# Altium PCB touch-2ch-2.PcbDoc
Units mm, origin at the board's own origin, x right, y up, seen from the top; angles counter-clockwise.
Board outline 90.83 x 39.88 mm, 2 copper layers (Top Layer, Bottom Layer); 32 components, 34 nets, 81 pads, 0 vias.
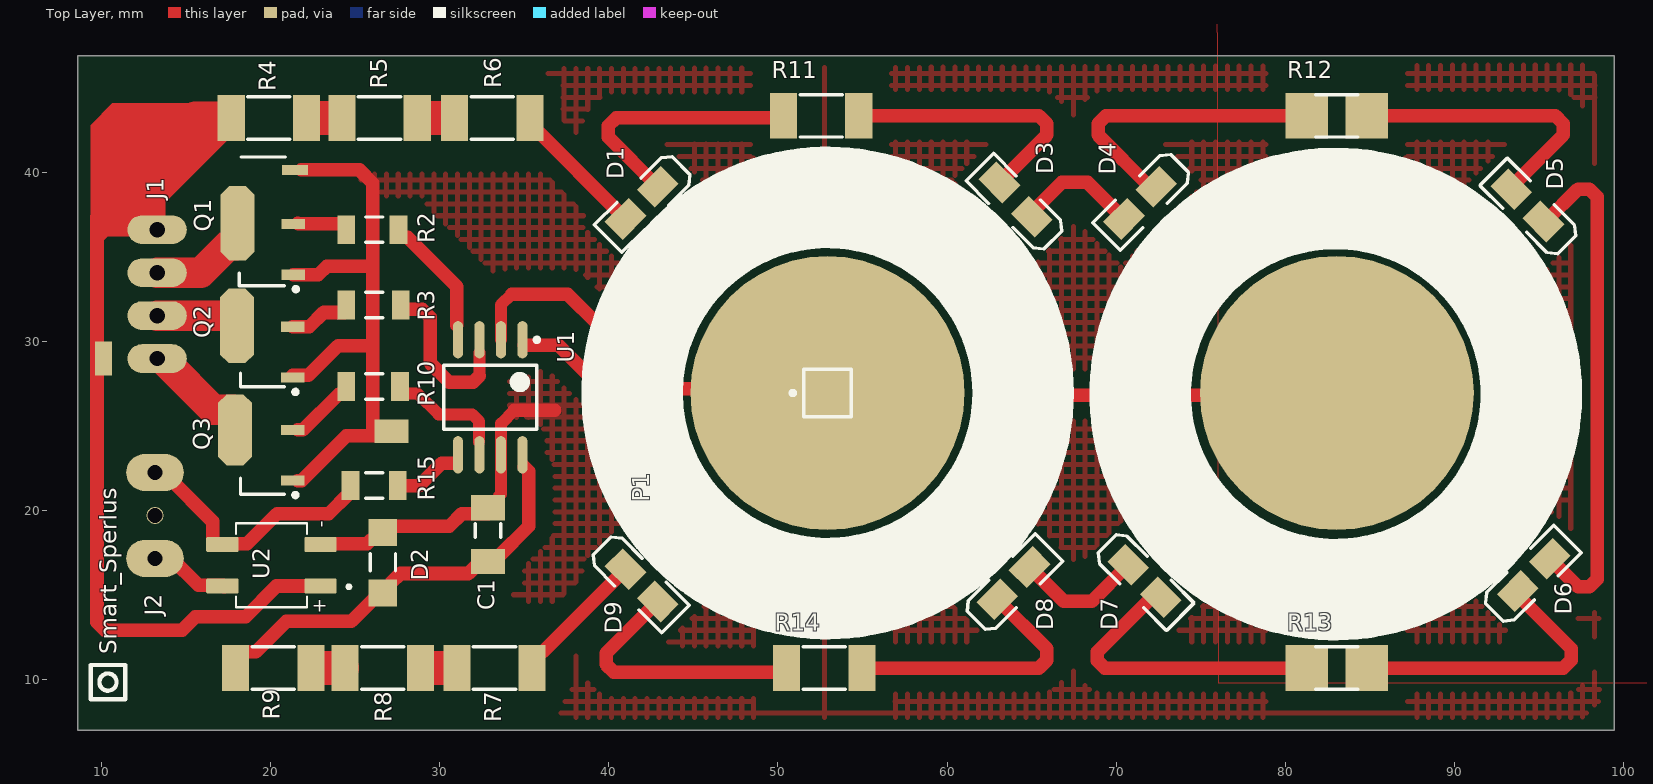
[diagram p0: Top Layer view]
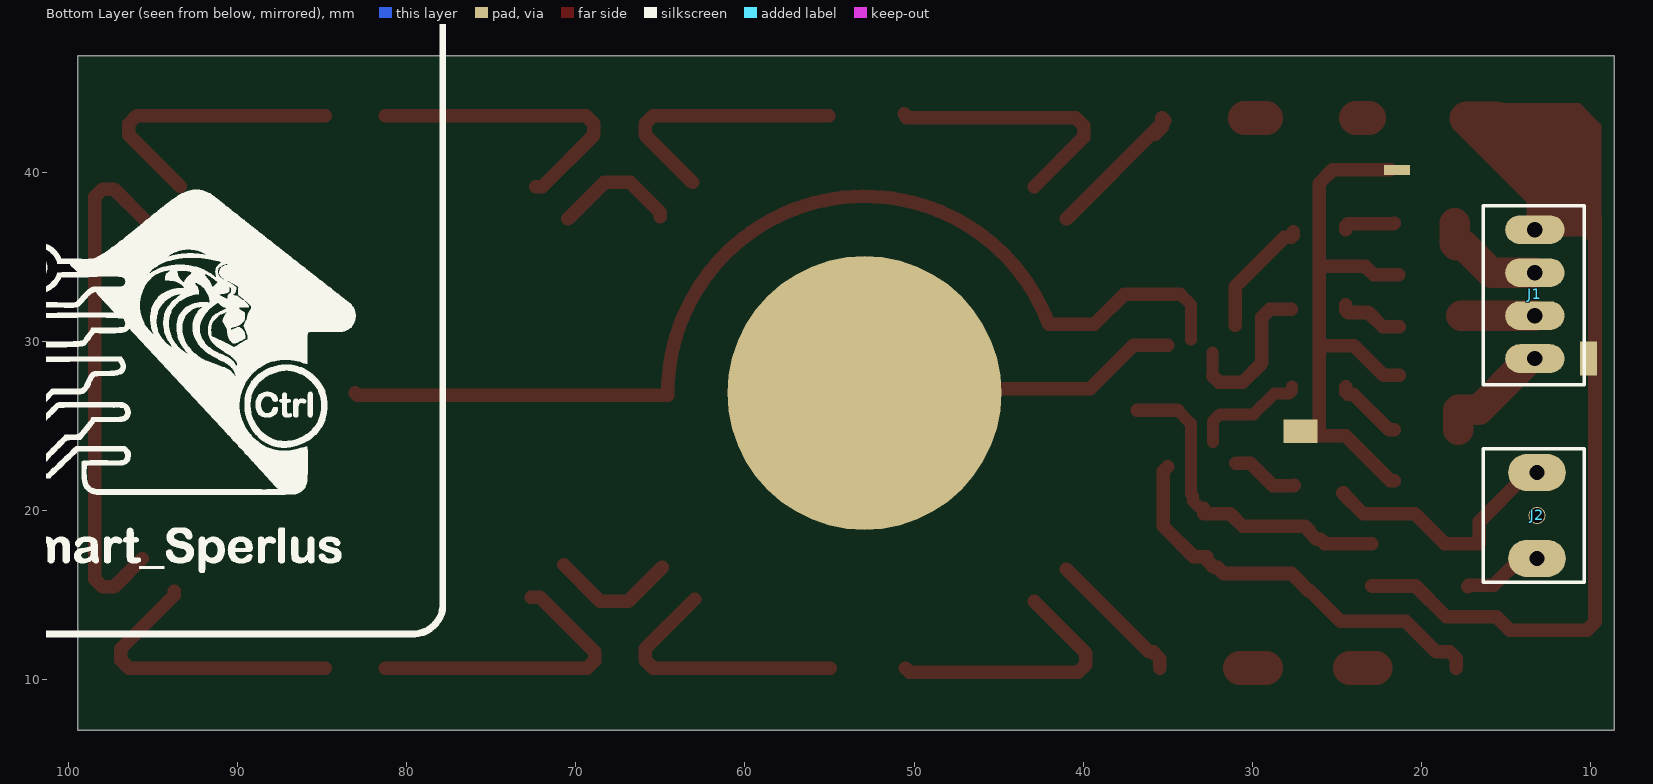
[diagram p1: Bottom Layer view, seen from below]
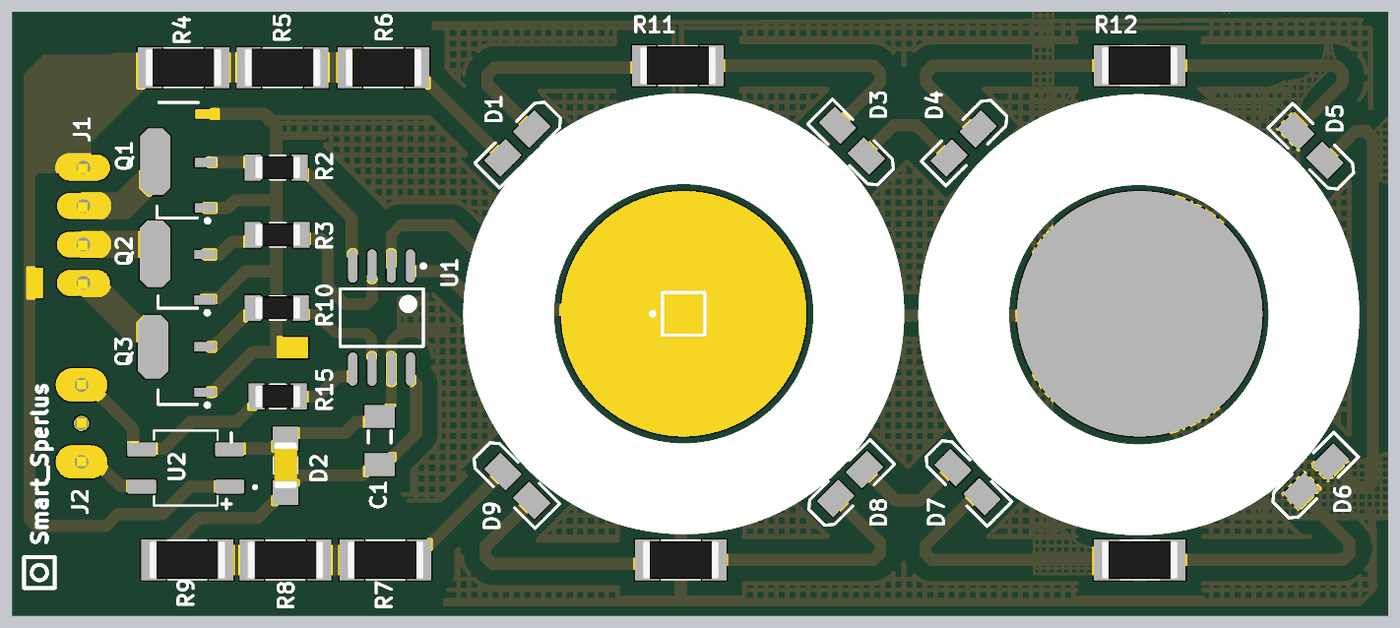
[diagram p2: 3D render of the assembled board from above, using the file's embedded part models]

## Layer stack, top to bottom
Top Solder: solder mask 0.0102, Solder Resist, Dk 3.5
Top Layer: signal copper 0.0356
Dielectric 1: dielectric 0.32, FR-4, Dk 4.8
Bottom Layer: signal copper 0.0356
Bottom Solder: solder mask 0.0102, Solder Resist, Dk 3.5

## Board outline
99.441,7.008 8.614,7.008 8.614,46.886 99.441,46.886

## Design rules (kind name [scope] priority, off if disabled: settings)
Clearance Clearance_1 [InPolygon] p1: gap=1 ignorepadtopadclearanceinfootprint=FALSE
Clearance [All] p2: gap=0.6 ignorepadtopadclearanceinfootprint=FALSE
PolygonConnect [All] p1: connectstyle=Relief reliefconductorwidth=0.254 reliefentries=4 polygonreliefangle="90 Angle" airgapwidth=0.254
RoomDefinition touch-2ch [InComponentClass('touch-2ch')] p1: confinementstyle=ConfineIn formatcopy=TRUE lockcomponents=FALSE outline 144.907,-4.953 247.904,-4.953 247.904,23.114 144.907,23.114
RoutingLayers [All] p1: top layer_v5=FALSE bottom layer_v5=TRUE
RoutingVias [All] p1: holewidth=0.711 width=2.5 viastyle="Through Hole" minholewidth=0.711 minwidth=1.27 maxholewidth=0.711 maxwidth=2
SolderMaskExpansion [All] p1: expansion=0.102 istentingtop=FALSE
Width [All] p1: maxlimit=3 minlimit=0.5 preferedwidth=1
29 further rules are at their usual default settings.

## Components (designator, comment, footprint, x,y, rotation, side; value= is the part's Value field where it differs from the comment)
C1 "=Value" "CAP 1206" 26.648,16.914 r90 top
D1 "LED2" 3.2X1.6X1.1#1 42.015,38.123 r45 top
D2 "Diode" C1206 32.871,18.819 r270 top
D3 "LED2" 3.2X1.6X1.1#2 63.986,38.25 r315 top
D4 "LED2" 3.2X1.6X1.1#3 71.479,38.25 r45 top
D5 "LED2" 3.2X1.6X1.1#3 94.361,37.973 r315 top
D6 "LED2" 3.2X1.6X1.1#1 94.615,16.256 r225 top
D7 "LED2" 3.2X1.6X1.1#4 71.733,15.771 r135 top
D8 "LED2" 3.2X1.6X1.1#4 63.986,15.771 r225 top
D9 "LED2" 3.2X1.6X1.1#3 41.888,15.644 r135 top
J1 "Header4X1" "HEADER 4X1" 13.313,36.599 r270 bottom
J2 "Header3X1" "HEADER 3X1" 13.186,17.168 r90 bottom
P1 "Plug" PIN1 52.937,26.947 r90 top
Q1 "Triac" SOT89N#1 19.558,35.433 r180 top
Q2 "Triac" SOT89N#1 19.536,29.361 r180 top (schematic designator Q1)
Q3 "Triac" SOT89N#2 19.536,23.265 r180 top
R2 "10K" "RES 1206 (3216X08L)"#1 26.14,36.599 r180 top
R3 "10K" "RES 1206 (3216X08L)"#2 26.14,32.154 r180 top
R4 "10K" "RES 2010 (5026X08L)"#1 19.917,43.203 r0 top
R5 "10K" "RES 2010 (5026X08L)"#1 26.46,43.203 r0 top
R6 "10K" "RES 2010 (5026X08L)"#1 33.125,43.203 r0 top
R7 "10K" "RES 2010 (5026X08L)"#1 33.252,10.691 r180 top
R8 "10K" "RES 2010 (5026X08L)"#1 26.648,10.691 r180 top
R9 "10K" "RES 2010 (5026X08L)"#1 20.171,10.691 r180 top
R10 "10K" "RES 1206 (3216X08L)"#3 26.14,27.328 r180 top
R11 "10K" "RES 2010 (5026X08L)"#1 52.556,43.33 r0 top
R12 "10K" "RES 2010 (5026X08L)"#2 83.037,43.33 r0 top
R13 "10K" "RES 2010 (5026X08L)"#3 83.037,10.691 r180 top
R14 "10K" "RES 2010 (5026X08L)"#1 52.744,10.691 r180 top
R15 "10K" "RES 1206 (3216X08L)"#4 26.14,21.486 r0 top
U1 "ATtiny15L-1SC" 8S2_N 32.998,26.693 r270 top
U2 "MB6S" SOIC245P670X270-4N 20.066,16.764 r180 top

## Footprints (in the part's own frame and the unit in brackets; to place one, negate y for a bottom-side part, rotate by r counter-clockwise, add the part's x,y. Pads: shape width x height; smd on the part's side, far side on the other; paste and mask are expansions set on the pad)
3.2X1.6X1.1#1 [mm] "SMT LED; 2 Flat Leads"
  rect 2x1.5 smd: 1(-1.347,0.09) 2(1.347,0.09)
  silkscreen extent -2.9,-1.15 3.2,1.15
3.2X1.6X1.1#2 [mm] "SMT LED; 2 Flat Leads"
  rect 2x1.5 smd: 1(-1.437,0.18) 2(1.347,0.09)
  silkscreen extent -2.9,-1.15 3.2,1.15
3.2X1.6X1.1#3 [mm] "SMT LED; 2 Flat Leads"
  rect 2x1.5 smd: 1(-1.437,0) 2(1.257,0)
  silkscreen extent -2.9,-1.15 3.2,1.15
3.2X1.6X1.1#4 [mm] "SMT LED; 2 Flat Leads"
  rect 2x1.5 smd: 1(-1.257,0) 2(1.437,0)
  silkscreen extent -2.9,-1.15 3.2,1.15
8S2_N [mm] "SOP, 8-Leads, Body 5.3x5.3mm, Pitch 1.27mm, IPC Medium Density"
  oval 2.2x0.6 smd: 1(-3.4,1.905) 2(-3.4,0.635) 3(-3.4,-0.635) 4(-3.4,-1.905) 5(3.4,-1.905) 6(3.4,-0.635) 7(3.4,0.635) 8(3.4,1.905)
  silkscreen extent -3.52,-2.75 1.9,2.88, body extent -2.73,-2.75 2.73,2.75, height 2.16
C1206 [mm] "Chip Capacitor, Body 3.2x1.6mm, IPC High Density"
  rect 1.5x2 smd: 1(-1.35,0) 2(1.83,0)
  silkscreen extent -0.4,-0.75 0.4,0.75, body extent -1.7,-0.9 1.7,0.9, height 1.3
"CAP 1206" [mm]
  rect 1.6x1.7 smd: 1(-1.778,0) 2(1.778,0)
  silkscreen extent -0.47,-0.75 0.53,0.75, body extent -1.49,-0.77 1.55,0.75, height 0.75
"HEADER 3X1" [mm]
  oval 2.2x3.4 hole 0.9: 1(0,0) 3(5.08,0)
  round 1 hole 0.9: 2(2.54,0)
  silkscreen extent -1.4,-2.79 6.48,3.17, body extent -1.24,-1.27 6.38,1.27, height 8.38
"HEADER 4X1" [mm]
  oval 1.7x3.5 hole 0.9: 1(0,0) 2(2.54,0) 3(5.08,0) 4(7.62,0)
  silkscreen extent -1.43,-3.05 9.18,2.92, body extent -1.19,-1.22 8.97,1.32, height 8.38
PIN1 [mm] "Connector; Plug"
  round 16.2 all layers, no hole: 1(0,0)
  silkscreen extent -1.4,-1.4 1.4,2.17
"RES 1206 (3216X08L)"#1 [mm] "Chip Resistor, 2-Leads, Body 3.2x1.6mm, IPC High Density _ (0.125 W)"
  rect 1.05x1.7 smd: 1(-1.44,0) 2(1.651,0)
  silkscreen extent -0.5,-0.75 0.5,0.75, body extent -1.52,-0.76 1.53,0.76, height 0.6
"RES 1206 (3216X08L)"#2 [mm] "Chip Resistor, 2-Leads, Body 3.2x1.6mm, IPC High Density _ (0.125 W)"
  rect 1.05x1.7 smd: 1(-1.567,0) 2(1.651,0)
  silkscreen extent -0.5,-0.75 0.5,0.75, body extent -1.52,-0.76 1.53,0.76, height 0.6
"RES 1206 (3216X08L)"#3 [mm] "Chip Resistor, 2-Leads, Body 3.2x1.6mm, IPC High Density _ (0.125 W)"
  rect 1.05x1.7 smd: 1(-1.524,0) 2(1.651,0)
  silkscreen extent -0.5,-0.75 0.5,0.75, body extent -1.52,-0.76 1.53,0.76, height 0.6
"RES 1206 (3216X08L)"#4 [mm] "Chip Resistor, 2-Leads, Body 3.2x1.6mm, IPC High Density _ (0.125 W)"
  rect 1.05x1.7 smd: 1(-1.397,0) 2(1.397,0)
  silkscreen extent -0.5,-0.75 0.5,0.75, body extent -1.52,-0.76 1.53,0.76, height 0.6
"RES 2010 (5026X08L)"#1 [mm] "Chip Resistor, 2-Leads, Body 5.0x2.6mm, IPC High Density _ (0.250 W)"
  rect 1.6x2.7 smd: 1(-2.225,0) 2(2.225,0)
  silkscreen extent -1.25,-1.25 1.25,1.25, body extent -2.54,-1.27 2.54,1.27, height 0.6
"RES 2010 (5026X08L)"#2 [mm] "Chip Resistor, 2-Leads, Body 5.0x2.6mm, IPC High Density _ (0.250 W)"
  rect 2.5x2.7 smd: 1(-1.779,0) 2(1.777,0)
  silkscreen extent -1.25,-1.25 1.25,1.25, body extent -2.54,-1.27 2.54,1.27, height 0.6
"RES 2010 (5026X08L)"#3 [mm] "Chip Resistor, 2-Leads, Body 5.0x2.6mm, IPC High Density _ (0.250 W)"
  rect 2.5x2.7 smd: 1(-1.777,0) 2(1.779,0)
  silkscreen extent -1.25,-1.25 1.25,1.25, body extent -2.54,-1.27 2.54,1.27, height 0.6
SOIC245P670X270-4N [mm]
  rrect23% 1.91x0.91 smd: 1(-2.9,1.225) 2(-2.9,-1.225) 3(2.9,-1.225) 4(2.9,1.225)
  silkscreen extent -4.68,-2.48 2.1,2.48
SOT89N#1 [mm] "SOT89, 3-Leads, Body 4.5x2.4 mm, Pitch 1.5mm, Lead Span 4.1mm, IPC Medium Density"
  rect 1.4x0.6 smd: 1(-1.8,1.5) 3(-1.8,-1.5)
  oct 2x4.4 smd: 2(1.502,-1.548)
  silkscreen extent -2.07,-5.46 1.27,2.47, body extent -1.3,-2.3 1.3,2.3, height 1.6
SOT89N#2 [mm] "SOT89, 3-Leads, Body 4.5x2.4 mm, Pitch 1.5mm, Lead Span 4.1mm, IPC Medium Density"
  rect 1.4x0.6 smd: 1(-1.8,1.5) 3(-1.8,-1.5)
  oct 2x4.2 smd: 2(1.629,-1.5)
  silkscreen extent -2.07,1.35 1.3,2.47, body extent -1.3,-2.3 1.3,2.3, height 1.6

## Part data
C1: library part Capacitor, "Capacitor"
D1 D3 D4 D5 D6 D7 D8 D9: "Typical RED, GREEN, YELLOW, AMBER GaAs LED", LatestRevisionDate=17-Jul-2002, LatestRevisionNote="Re-released for DXP Platform.", PackageDescription="SM LED; 2 Flat Leads", PackageReference=3.2X1.6X1.1, PackageVersion=Feb-2002, Published=8-Jun-2000, Publisher="Altium Limited"
D2: "Default Diode", Code_JEDEC=DO-214-AB, LatestRevisionDate=17-Jul-2002, LatestRevisionNote="Re-released for DXP Platform.", PackageDescription="DO-214-AB/SMC; 2 C-Bend Leads; Body 7.9 x 5.9 mm, inc. leads (LxW)", PackageReference=SMC, PackageVersion=Sep-1996, Published=8-Jun-2000, Publisher="Altium Limited"
Q1 Q2 Q3: "Silicon Bidirectional Triode Thyristor", ComponentLink1Description="Manufacturer Link", ComponentLink1URL=http://www.motorola.com/, DatasheetVersion=1999, LatestRevisionDate=17-Jul-2002, LatestRevisionNote="Re-released for DXP Platform.", Note="Pin 2 is electrically connected to Pin 4 (TAB)", PackageDescription="TO, Thru-Hole, Vertical, Heatsink Mounted; 3 In-Line Leads; Pitch 2.28 mm", PackageReference=369-03, Published=29-Sep-2000, Publisher="Altium Limited"
R2 R3 R4 R5 R6 R7 R8 R9 R10 R11 R12 R13 R14 R15: library part Resistor, "Resistor", Power="1/4 W", Tolerance=5%
U1: "8-Bit AVR Microcontroller with 1K Byte of Flash Memory", Supplier Part Number 1=ATTINY15L-1SC-ND, ComponentLink1Description=Datasheet, ComponentLink1URL=http://www.atmel.com/dyn/resources/prod_documents/doc1187.pdf, ComponentLink2Description="Atmel.com Home", ComponentLink2URL=http://www.atmel.com, DatasheetVersion=1187E-AVR-06/02, LatestRevisionDate=16-Oct-2006, LatestRevisionNote="IPC-7351 Footprint Added.", PackageDescription="8-Lead, 0.208\" Body, Plastic Small Outline Package (EIAJ)", PackageReference=8S2, PackageVersion="revF, Apr-2008", Published=17-Sep-2003, Publisher="Altium Limited", Supplier 1=Digi-Key, Supplier 2=Mouser, Supplier Part Number 2=556-ATTINY15L1SC
U2: "Bridge Rectifier Single Phase Standard 600V Surface Mount 4-SOIC", Package="BESOP-4 Surge Components", Digi-Key_Part_Number=MB6SCT-ND, Digi-Key_Purchase_URL=https://www.digikey.com.tr/product-detail/en/on-semiconductor/MB6S/MB6SCT-ND/965654?utm_source=snapeda&utm_medium=aggregator&utm_campaign=symbol, MF="ON Semiconductor", MP=MB6S, SnapEDA_Link=https://www.snapeda.com/parts/MB6S/ON%20Semiconductor/view-part/2774209/?ref=snap
P1: LatestRevisionDate=17-Jul-2002, LatestRevisionNote="Re-released for DXP Platform.", Publisher="Altium Limited"

## Free pads (board coordinates)
  rect 2x1.4 all layers, no hole: 156(27.156,24.694)
  round 16.2 smd: 157(83.037,26.947)
  rect 1x2 all layers, no hole: 160(10.138,28.979)
  rect 1.524x0.6 all layers, no hole: 163(21.463,40.132)

## Nets (pads, with @x,y where several pads share a name; then routed paths per layer and width w, separated by ;. In a path a pad name is that pad's centre, name@x,y a point inside that pad or via, vN(x,y) a via of type N, cw(c..) or ccw(c..) an arc to the next point about the centre after c; other vN are vias at no path point)
GND: C1.2 D2.1 pad.156 pad.163 Q1.1 Q2.1 Q3.1 U1.7 U2.2 | length 55.5
  Top Layer w0.7: D2.1 33.121,20.169 33.52,20.569 33.52,20.867 33.633,20.979 U1.7 33.643,23.303 33.643,25.142 34.431,25.931
  Top Layer w0.8: Q2.1@21.335,27.987 22.25,27.987 24.004,29.741 26.054,29.741 ; Q1.1 22.839,33.933 23.345,34.44 26.054,34.44 ; Q3.1@21.636,21.765 21.847,21.765 24.488,24.407 26.054,24.407 ; pad.163@21.825,40.132 25.273,40.132 26.054,39.351 26.054,34.44 ; U2.2@22.948,18.034 25.729,18.034 25.986,18.292 26.198,18.292 26.648,18.742 26.648,18.819 26.902,19.073 30.585,19.073 31.331,19.819 D2.1@32.871,19.819 ; pad.156@26.555,24.407 26.054,24.407 ; 34.431,25.931 36.808,25.931 ; 26.054,24.407 26.054,29.741 ; 26.054,29.741 26.054,34.44
NetD1_1: D1.1 R6.2 | length 9.3
  Top Layer w0.8: R6.2@35.179,43.053 R6.2@35.35,42.883 ; R6.2 R6.2@35.35,42.883 ; R6.2@35.749,42.253 35.35,42.653 R6.2@35.35,42.883 ; D1.1 R6.2@35.35,42.883
NetD1_2: D1.2 R11.1 | length 15.7
  Top Layer w0.8: D1.2 39.971,42.071 39.971,42.734 40.44,43.203 R11.1@50.458,43.203 ; R11.1@50.458,43.33 R11.1@50.585,43.457
NetD3_1: D3.1 R11.2 | length 15.7
  Top Layer w0.8: R11.2@55.035,43.33 65.433,43.33 65.902,42.861 65.902,42.198 D3.1
NetD3_2: D3.2 D4.1 | length 7.3
  Top Layer w0.8: D3.2 65.002,37.615 66.78,39.393 68.303,39.393 D4.1
NetD4_2: D4.2 R12.1 | length 17.9
  Top Layer w0.8: D4.2 71.987,39.139 68.927,42.198 68.927,42.861 69.396,43.33 R12.1
NetD5_1: D5.1 R12.2 | length 16.8
  Top Layer w0.8: R12.2 95.958,43.33 96.427,42.861 96.427,42.198 D5.1@93.389,39.16
NetD5_2: D5.2 D6.1 | length 30.3
  Top Layer w0.8: D5.2@95.384,37.091 97.294,39.001 97.956,39.001 98.425,38.532 98.425,15.951 97.956,15.482 97.294,15.482 D6.1
NetD6_2: D6.2 R13.1 | length 17.7
  Top Layer w0.8: R13.1 96.421,10.691 96.89,11.159 96.89,11.822 93.726,14.986 D6.2
NetD7_1: D7.1 R13.2 | length 18.1
  Top Layer w0.8: D7.1 72.114,14.882 68.89,11.658 68.89,11.12 69.32,10.691 R13.2
NetD7_2: D7.2 D8.1 | length 7.6
  Top Layer w0.8: D8.1 66.907,14.628 68.557,14.628 D7.2
NetD8_2: D8.2 R14.1 | length 15.9
  Top Layer w0.8: R14.1 65.433,10.691 65.902,11.159 65.902,11.822 D8.2
NetD9_1: D9.1 R14.2 | length 16
  Top Layer w0.8: D9.1 39.844,11.568 39.844,10.905 40.313,10.437 50.265,10.437 R14.2
NetD9_2: D9.2 R7.1 | length 8.3
  Top Layer w0.8: R7.1 35.477,11.241 35.876,11.64 36.106,11.64 D9.2
NetJ1_2: J1.2 Q1.2 | length 6.7
  Top Layer w1.8: J1.2 15.898,34.059 17.52,35.681 17.956,35.681 18.056,35.781 Q1.2
NetJ1_3: J1.3 Q2.2 | length 4.3
  Top Layer w1.8: J1.3 Q2.2@17.653,31.519
NetJ1_4: J1.4 Q3.2 | length 6.4
  Top Layer w1.8: J1.4@13.781,28.818 16.634,25.965 17.807,25.965 17.834,25.938 Q3.2@17.834,24.765
NetJ2_1: J2.1 U2.4 | length 4.8
  Top Layer w0.8: J2.1 14.164,17.168 15.757,15.575 17.208,15.575 U2.4@17.289,15.494
NetJ2_3: J2.3 R15.1 U2.3 | length 15.7
  Top Layer w0.8: J2.3@12.664,22.007 13.934,22.007 16.589,19.353 16.589,18.034 18.624,18.034 20.402,19.812 23.45,19.812 24.618,20.98 24.618,21.036 R15.1@24.674,21.036
NetP1_1: P1.1 U1.1 | length 18
  Top Layer w0.8: U1.1@35.003,29.757 37.045,29.757 39.602,27.201 P1.1@51.921,27.201
NetQ1_3: Q1.3 R2.2 | length 3.1
  Top Layer w0.8: Q1.3@21.636,36.984 21.663,36.957 24.364,36.957 24.489,36.832 R2.2
NetQ2_3: Q2.3 R3.2 | length 3.9
  Top Layer w0.8: Q2.3 22.307,30.861 23.149,31.704 24.364,31.704 24.489,31.829 R3.2
NetQ3_3: Q3.3 R10.2 | length 4.1
  Top Layer w0.8: Q3.3@21.636,24.765 21.926,24.765 24.039,26.878 24.364,26.878 24.489,27.003 R10.2
NetR4_2: R4.2 R5.1 | length 0.8
  Top Layer w2: 23.114,43.203 R5.1@23.876,43.203
NetR5_2: R5.2 R6.1 | length 1.3
  Top Layer w2: R5.2@29.188,43.203 R6.1@30.458,43.203
NetR7_2: R7.2 R8.1 | length 1.5
  Top Layer w2: R8.1@29.21,10.691 R7.2@30.734,10.691
NetR8_2: R8.2 R9.1 | length 1.5
  Top Layer w2: R9.1@22.733,10.691 R8.2@24.257,10.691
o1: pad.157 U1.2 | length 62.5
  Top Layer w0.7: U1.2 33.633,32.154 34.268,32.789
  Top Layer w0.8: 34.268,32.789 37.57,32.789 39.348,31.011 42.015,31.011 ; 42.042,31 cw(c52.937,26.947) 64.56,26.824 82.914,26.824 pad.157
o2: R2.1 U1.4 | length 7.2
  Top Layer w0.8: R2.1@27.579,36.472 27.579,36.274 27.704,36.149 28.113,36.149 31.032,33.23 U1.4@31.032,30.944
o3: R3.1 U1.3 | length 9.6
  Top Layer w0.7: 32.363,27.963 U1.3@32.363,29.343
  Top Layer w0.8: R3.1@27.707,31.9 28.973,31.9 29.442,31.431 29.442,28.725 30.585,27.582 31.982,27.582 32.363,27.963
o4: R10.1 U1.6 | length 6.9
  Top Layer w0.7: R10.1 27.664,27.09 27.838,26.915 28.711,26.915 29.95,25.677 31.932,25.677 32.343,25.266 U1.6@32.343,24.042
o5: R15.2 U1.5 | length 4
  Top Layer w0.8: R15.2 27.55,21.472 28.793,21.472 30.122,22.801 U1.5@30.992,22.801
vcc: C1.1 D2.2 R9.2 U1.8 | length 24.8
  Top Layer w0.8: R9.2 17.946,11.241 18.346,11.64 19.133,11.64 20.955,13.462 24.797,13.462 26.598,15.263 C1.1@26.648,15.263 ; C1.1@26.698,15.263 27.097,15.663 27.097,15.683 27.693,16.279 31.71,16.279 32.07,16.639 32.271,16.639 32.71,17.078 32.71,17.279 33.489,17.279 35.284,19.073 35.284,22.312 U1.8@35.003,22.593
VDD: J1.1 pad.160 R4.1 U2.1 | length 56
  Top Layer w0.8: 15.576,43.18 9.757,37.361 9.757,28.979 9.757,13.401 10.225,12.933 14.793,12.933 15.576,13.716 18.542,13.716 20.365,15.539 U2.1
  Top Layer w2: 12.805,37.488 12.805,38.631 17.354,43.18 15.576,43.18
pads on no net: J2.2

## Polygon pours and split planes (outlines as drawn)
GND on Top Layer "GND_L01_P054" (hatched 90Degree grid 0.7 track 0.3, remove dead copper, pour order 54): 37.189,7.77 97.536,7.77 98.552,8.786 98.287,45.731 97.673,46.345 36.427,46.113 36.427,44.854 37.062,44.219 37.062,40.536 36.427,39.901 25.251,39.901 25.251,39.647 25.886,39.012 25.886,38.377 28.934,38.377 34.141,33.17 34.141,15.263 34.776,14.628 36.935,14.628 37.951,13.612 37.951,9.548 37.189,8.786
GND on Top Layer "NONET_L01_P024" (hatched 90Degree grid 0.5 track 0.2, shelved, pour order 24): 75.946,71.374 115.697,71.374 115.57,71.247 115.57,9.779 76.073,9.779

## Keep-outs
Keep-Out Layer:
  lines w0.7: 0,-0.381 0,85 150,85 150,0 0,0

## Other copper
Top Layer:
  region net VDD: 9.376,35.887 9.376,42.777 10.668,44.069 16.256,44.069 16.256,41.32 13.44,38.504 13.186,38.504 13.186,36.218 13.059,36.091 12.932,36.218 10.392,36.218 9.757,35.583

## Silkscreen, mask and mechanical layers (free items; w line width, h text height)
Top Overlay:
  circle w6: c82.975,26.885 r11.557
  circle w6: c52.937,26.947 r11.557
  circle w0.254: c10.406,9.859 r0.508
  lines w0.2: 18.161,34.036 18.161,33.274 20.828,33.274 ; 18.236,27.315 18.236,28.119
  lines w0.254: 9.39,8.843 11.422,8.843 11.422,10.875 9.39,10.875 9.39,8.843
  text "Smart_Sperlus" at 10.914,11.51 h1 r90
Bottom Overlay:
  drawing of 14186 lines, arcs and shapes, not listed
Bottom Solder:
  the board outline again, w0.2

## Text inside footprints (layer, text, board x,y; h text height)
U2: Top Overlay "-" at 22.755,19.408 h0.81 r270; Top Overlay "+" at 23.39,14.709 h0.81 r180